# EAGLE board NN22_RPi_DetAdapter02_s00 (EAGLE 7.7.0), part 1 of 2
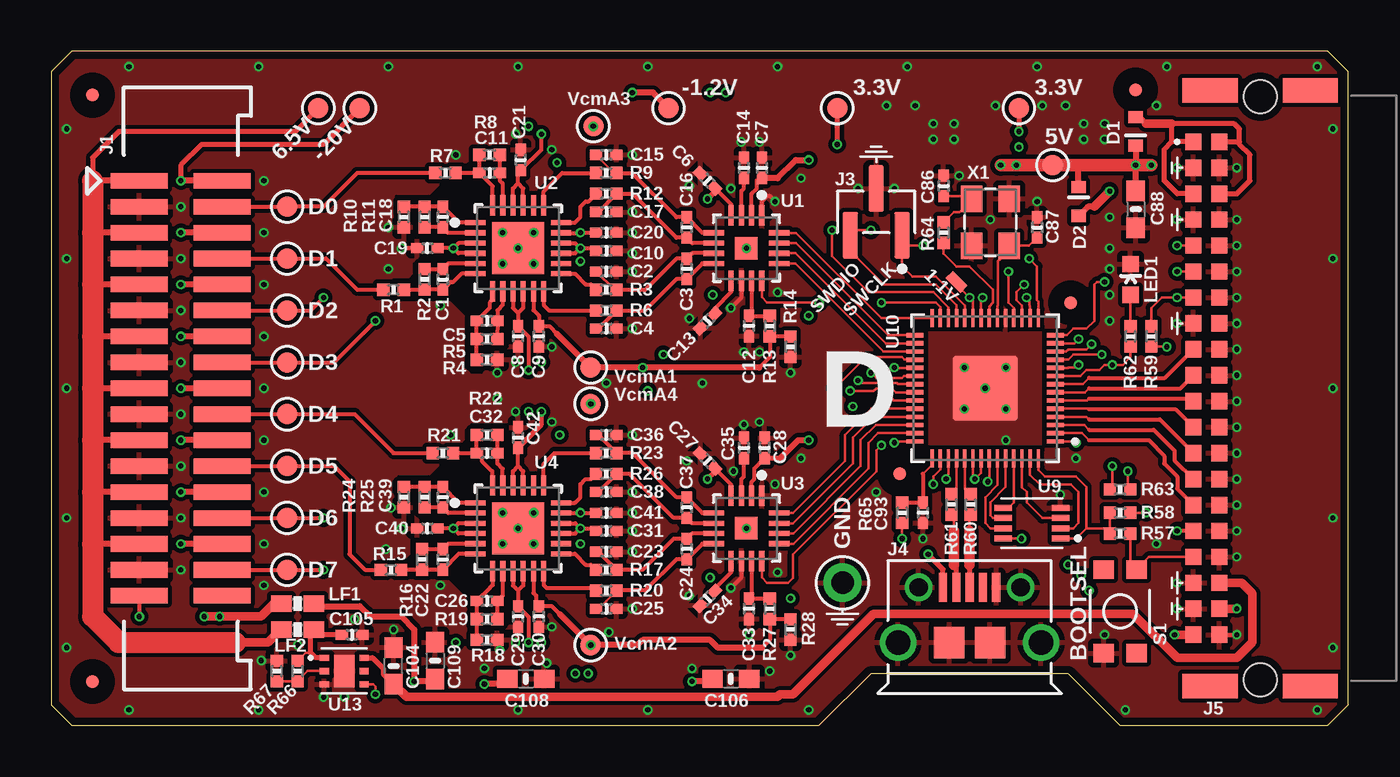
[diagram p0: board, top side]
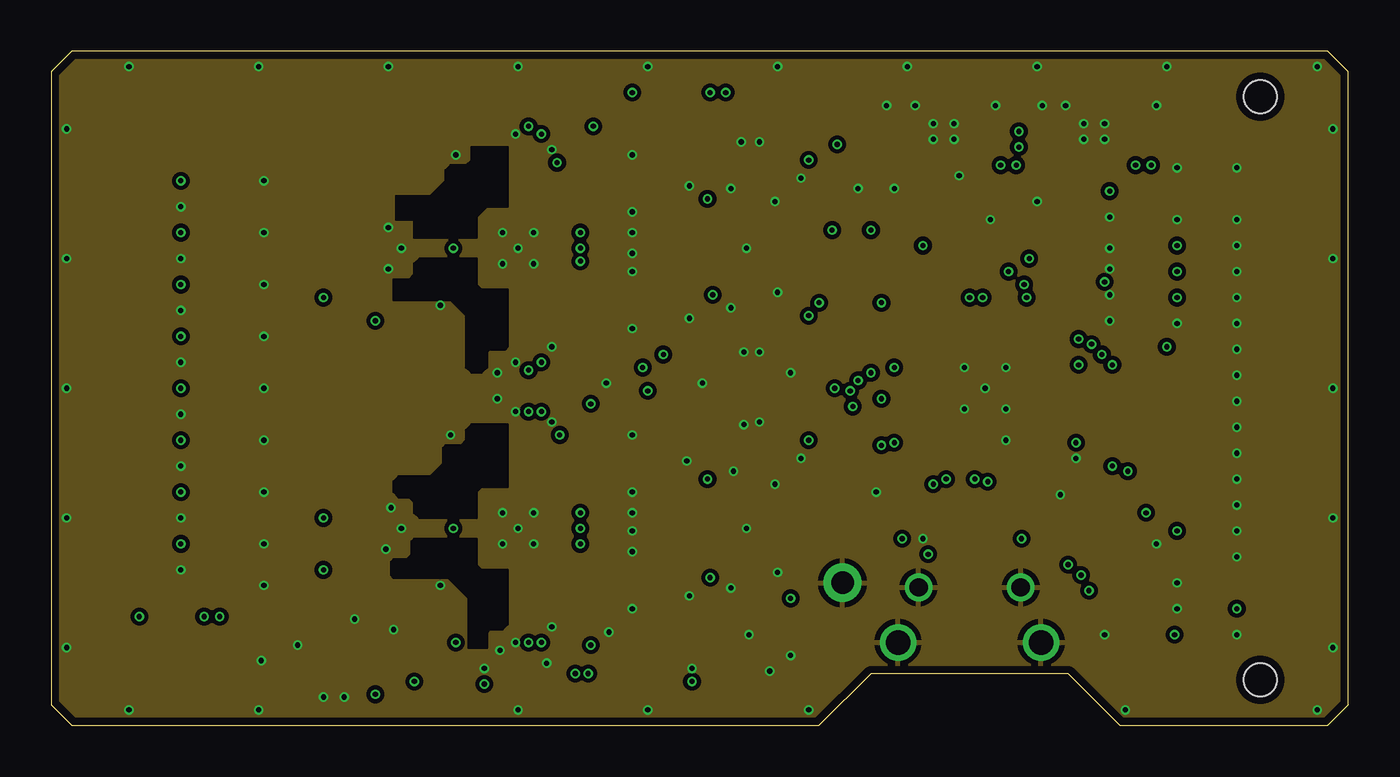
[diagram p1: board, inner layer Route2]
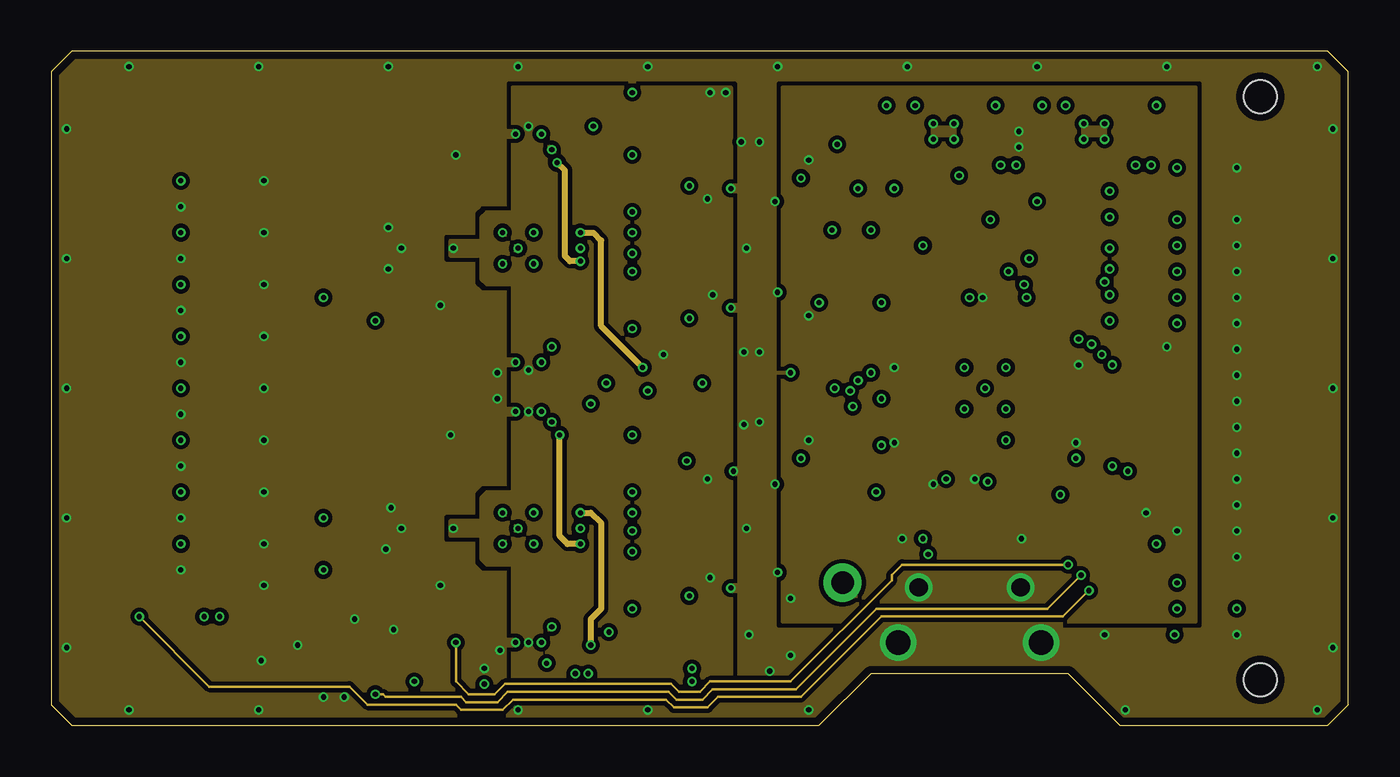
[diagram p2: board, inner layer Route3]
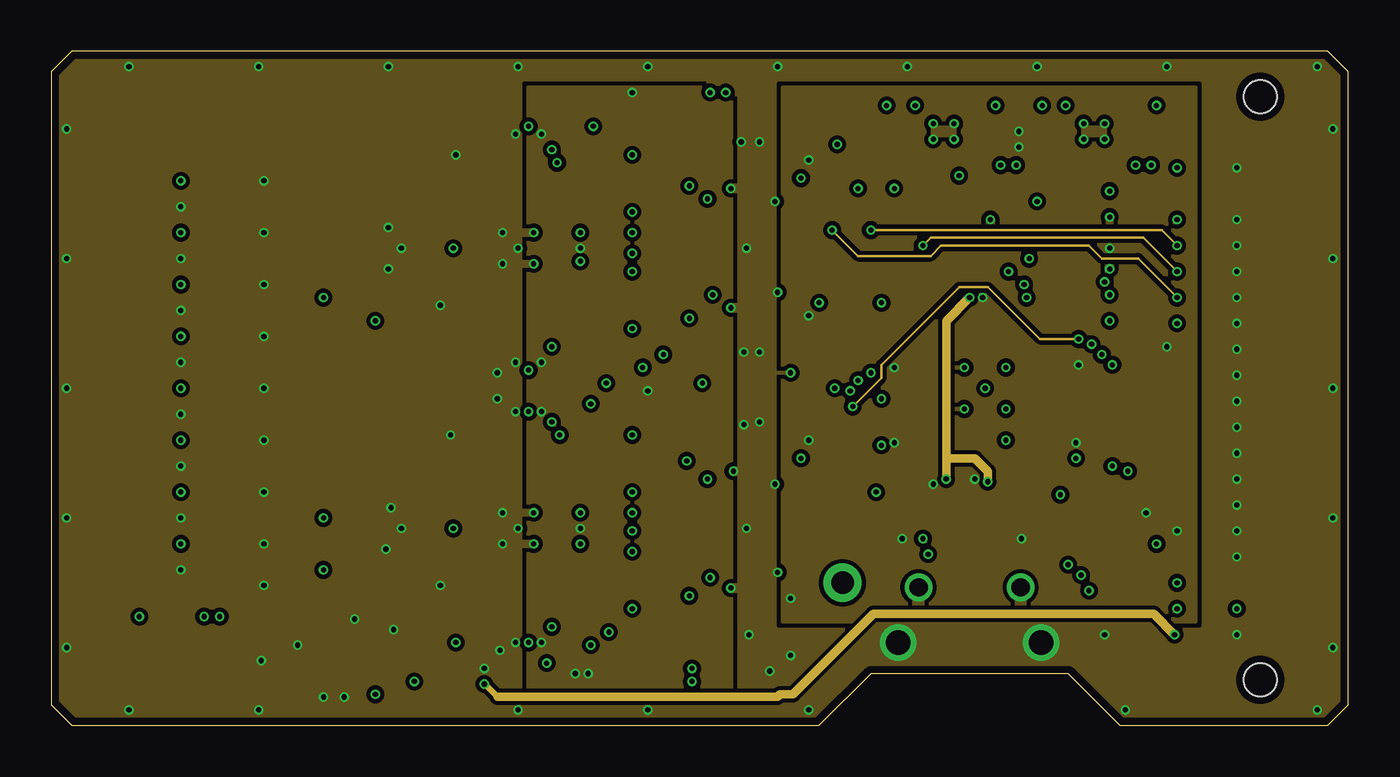
[diagram p3: board, inner layer Route14]
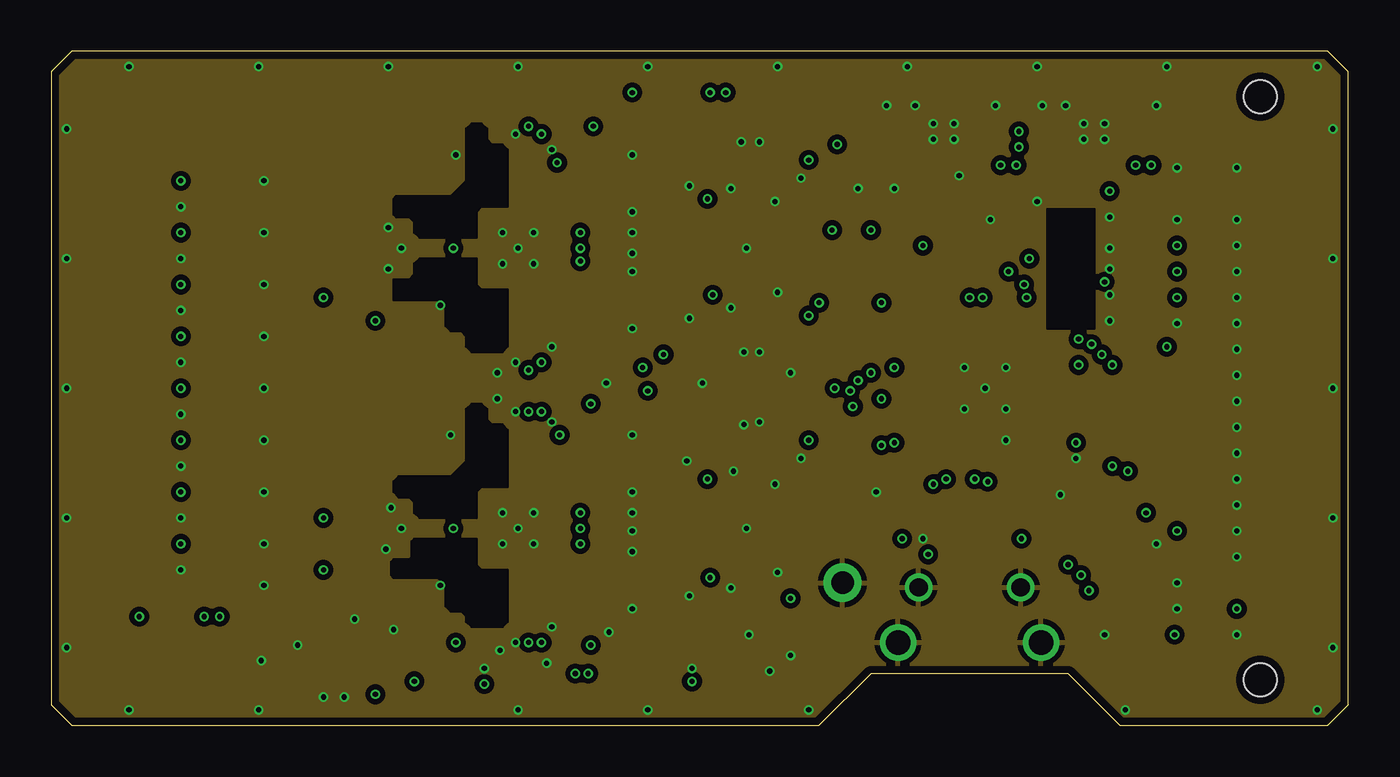
[diagram p4: board, inner layer Route15]
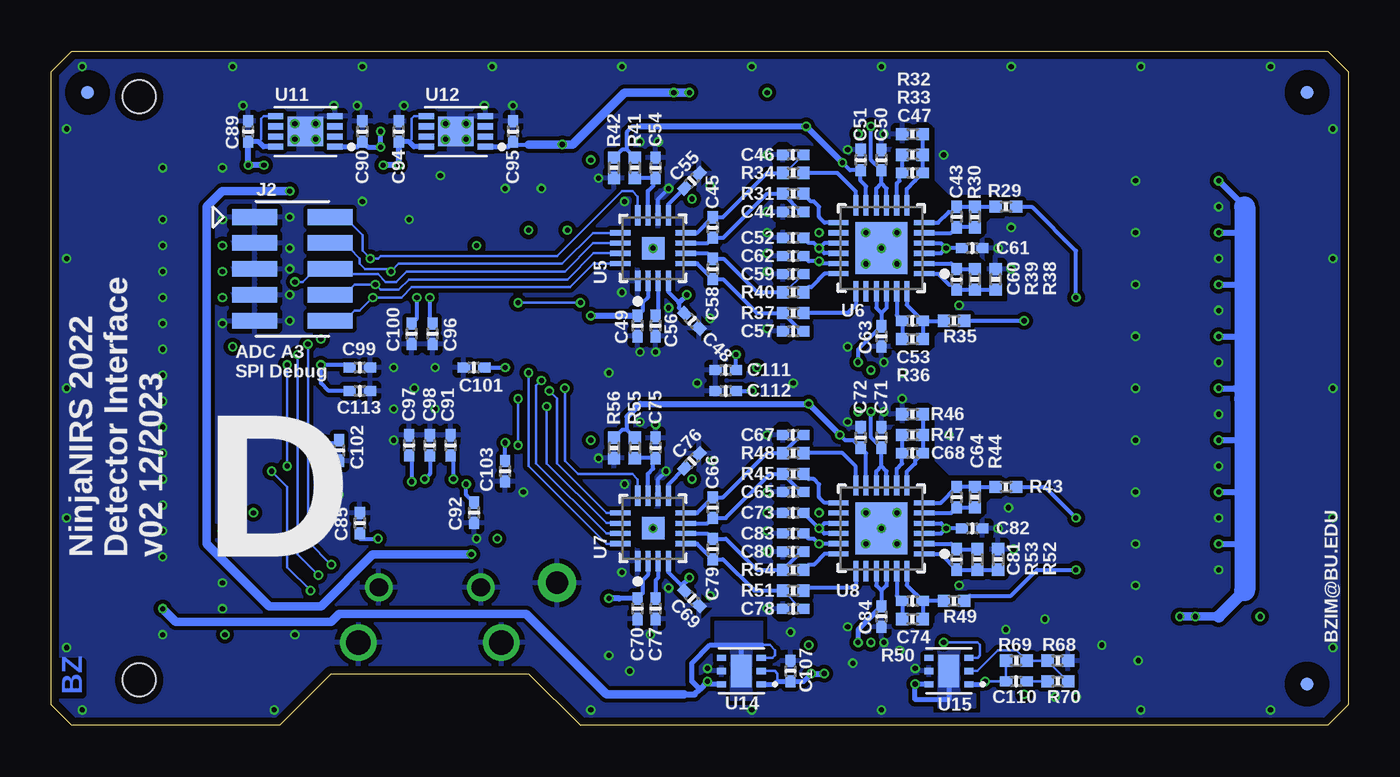
[diagram p5: board, bottom side, seen from below]

Size 63.5 x 33.02 mm. Coordinates in mm from the lower left corner, seen from the top.
Outline: 63.5,1.02 63.5,32 62.48,33.02 1.02,33.02 0,32 0,1.02 1.02,0 37.59,0 40.13,2.54 49.78,2.54 52.32,0 62.48,0 63.5,1.02
Copper layers (1*2*3*14*15*16): Top 0.04318125mm / dielectric 0.11074375mm / Route2 0.017271875mm / dielectric 4mil / Route3 0.017271875mm / dielectric 0.925575mm / Route14 0.017271875mm / dielectric 4mil / Route15 0.017271875mm / dielectric 0.11074375mm / Bottom 0.04318125mm
Design rules "oshpark-6layer *": minimum track width 5mil, minimum drill 10mil, track to track 5mil, track to pad 5mil, pad to pad 5mil, via to via 5mil, smd to smd 5mil, copper to edge 15mil, drill to drill 6mil, minimum pad ring 4mil, minimum via ring 4mil, stop-mask expansion 1.5mil, vias tented up to drill 12mil, thermal gap 10mil
tRestrict: area 35.1,24.9 to 35.1,25.1; area 23.4,19.2 to 23.5,19.4; area 24.2,19.2 to 24.3,19.4; area 27.6,23.7 to 27.8,23.8; area 27.6,24.7 to 27.8,24.7; area 27.6,25.4 to 27.8,25.5; area 21.3,21.8 to 24.4,24.9; area 33.3,22.6 to 34.8,24.1; area 21.3,8.1 to 24.4,11.2; area 33.3,8.9 to 34.8,10.4; area 57,24.1 to 57.3,24.2; area 57,22.8 to 57.3,22.9; 22 more areas
bRestrict: area 27.5,10.9 to 27.8,10.9; area 27.5,9.9 to 27.8,9.9; area 27.5,8.9 to 27.8,9; area 27.5,5.3 to 27.8,5.3; area 27.5,14.6 to 27.8,14.7; area 27.5,18.9 to 27.8,18.9; area 27.5,22.5 to 27.8,22.6; area 27.5,23.4 to 27.8,23.5; area 27.5,24.5 to 27.8,24.5; area 27.5,28.3 to 27.8,28.4; area 34.3,5.1 to 34.4,5.4; area 34.3,18.9 to 34.4,19.2; 4 more areas

## Footprints (pad centres in the part's own frame; a part is rotated, then mirrored left to right if it is on the bottom)
0402-CAP = smd 0.6 x 0.5: 1 -0.5,0; 2 0.5,0
0603-CAP = smd 1 x 0.9: 1 -0.9,0; 2 0.9,0
SOD523 = smd 0.6 x 0.7: A -0.7,0; C 0.7,0
MICRO-FIDUCIAL = smd 0.635 x 0.635: 1 0,0
M17X2_0.050_SHF = smd 2.794 x 0.762: 1 -2.032,10.16; 2 2.032,10.16; 3 -2.032,8.89; 4 2.032,8.89; 5 -2.032,7.62; 6 2.032,7.62; 7 -2.032,6.35; 8 2.032,6.35; 9 -2.032,5.08; 10 2.032,5.08; 11 -2.032,3.81; 12 2.032,3.81; 13 -2.032,2.54; 14 2.032,2.54; 15 -2.032,1.27; 16 2.032,1.27; 17 -2.032,0; 18 2.032,0; 19 -2.032,-1.27; 20 2.032,-1.27; 21 -2.032,-2.54; 22 2.032,-2.54; 23 -2.032,-3.81; 24 2.032,-3.81; 25 -2.032,-5.08; 26 2.032,-5.08; 27 -2.032,-6.35; 28 2.032,-6.35; 29 -2.032,-7.62; 30 2.032,-7.62; 31 -2.032,-8.89; 32 2.032,-8.89; 33 -2.032,-10.16; 34 2.032,-10.16
M05X2_0.050_SMD_NO_CREAM = smd 2.21 x 0.762: 1 -1.841,2.54; 2 1.841,2.54; 3 -1.841,1.27; 4 1.841,1.27; 5 -1.841,0; 6 1.841,0; 7 -1.841,-1.27; 8 1.841,-1.27; 9 -1.841,-2.54; 10 1.841,-2.54
M03X1_0.050_SMD_NO_CREAM = smd 0.762 x 2.286: 1 -1.27,1.143; 2 0,-1.143; 3 1.27,1.143
USB-MICRO = smd 0.4 x 1.4: 1 -1.3,2.7; 2 -0.65,2.7; 3 0,2.7; 4 0.65,2.7; 5 1.3,2.7 | drill 0.9: SH1 -2.5,2.7; SH2 2.5,2.7 | drill 1.2: SH3 -3.5,0; SH6 3.5,0 | smd 1.5 x 1.55: SH4 -1,0; SH5 1,0
M20X2_HARFLEX_M = smd 0.8 x 0.8: A1 12.065,2; A2 10.795,2; A3 9.525,2; A4 8.255,2; A5 6.985,2; A6 5.715,2; A7 4.445,2; A8 3.175,2; A9 1.905,2; A10 0.635,2; A11 -0.635,2; A12 -1.905,2; A13 -3.175,2; A14 -4.445,2; A15 -5.715,2; A16 -6.985,2; A17 -8.255,2; A18 -9.525,2; A19 -10.795,2; A20 -12.065,2; B1 12.065,3.27; B2 10.795,3.27; B3 9.525,3.27; B4 8.255,3.27; B5 6.985,3.27; B6 5.715,3.27; B7 4.445,3.27; B8 3.175,3.27; B9 1.905,3.27; B10 0.635,3.27; B11 -0.635,3.27; B12 -1.905,3.27; B13 -3.175,3.27; B14 -4.445,3.27; B15 -5.715,3.27; B16 -6.985,3.27; B17 -8.255,3.27; B18 -9.525,3.27; B19 -10.795,3.27; B20 -12.065,3.27 | smd 1.2 x 2.7: P$17 -14.575,2.45; P$18 -14.575,-2.45; P$19 14.575,2.45; P$20 14.575,-2.45 | hole 1.6: -14.275,0; 14.275,0
LED-0603 = smd 0.8 x 0.8: A 0,-0.75; C 0,0.75
0603-FER = smd 1 x 0.8: 1 -0.8,0; 2 0.8,0
0402-RES = smd 0.6 x 0.6: 1 -0.5,0; 2 0.5,0
TACTILE_SWITCH_SMD-3 = smd 0.9 x 1: 1 -2.05,0.8; 2 2.05,0.8; 3 -2.05,-0.8; 4 2.05,-0.8
TESTPAD_ROUND = smd 1.016 x 1.016: P$1 0,0
1X01 = drill 1.1 pad 1.88: 1 0,0
TESTPAD_SMALL = smd 1.016 x 0.508: P$1 0,0
LFCSP16 = smd 1 x 0.25: 1 -1.6,0.75; 2 -1.6,0.25; 3 -1.6,-0.25; 4 -1.6,-0.75; 9 1.6,-0.75; 10 1.6,-0.25; 11 1.6,0.25; 12 1.6,0.75 | smd 0.25 x 1: 5 -0.75,-1.6; 6 -0.25,-1.6; 7 0.25,-1.6; 8 0.75,-1.6; 13 0.75,1.6; 14 0.25,1.6; 15 -0.25,1.6; 16 -0.75,1.6 | smd 1.1 x 1.1: EP 0,0
LFCSP24 = smd 1 x 0.25: 1 -2.1,1.25; 2 -2.1,0.75; 3 -2.1,0.25; 4 -2.1,-0.25; 5 -2.1,-0.75; 6 -2.1,-1.25; 13 2.1,-1.25; 14 2.1,-0.75; 15 2.1,-0.25; 16 2.1,0.25; 17 2.1,0.75; 18 2.1,1.25 | smd 0.25 x 1: 7 -1.25,-2.1; 8 -0.75,-2.1; 9 -0.25,-2.1; 10 0.25,-2.1; 11 0.75,-2.1; 12 1.25,-2.1; 19 1.25,2.1; 20 0.75,2.1; 21 0.25,2.1; 22 -0.25,2.1; 23 -0.75,2.1; 24 -1.25,2.1 | smd 2.55 x 2.55: EP 0,0
USON8L-2X3MM = smd 0.85 x 0.3: 1 -1.4,0.75; 2 -1.4,0.25; 3 -1.4,-0.25; 4 -1.4,-0.75; 5 1.4,-0.75; 6 1.4,-0.25; 7 1.4,0.25; 8 1.4,0.75
QFN-56_EP = smd 0.875 x 0.2: 1 -3.438,2.6; 2 -3.438,2.2; 3 -3.438,1.8; 4 -3.438,1.4; 5 -3.438,1; 6 -3.438,0.6; 7 -3.438,0.2; 8 -3.438,-0.2; 9 -3.438,-0.6; 10 -3.438,-1; 11 -3.438,-1.4; 12 -3.438,-1.8; 13 -3.438,-2.2; 14 -3.438,-2.6; 29 3.438,-2.6; 30 3.438,-2.2; 31 3.438,-1.8; 32 3.438,-1.4; 33 3.438,-1; 34 3.438,-0.6; 35 3.438,-0.2; 36 3.438,0.2; 37 3.438,0.6; 38 3.438,1; 39 3.438,1.4; 40 3.438,1.8; 41 3.438,2.2; 42 3.438,2.6 | smd 0.2 x 0.875: 15 -2.6,-3.438; 16 -2.2,-3.438; 17 -1.8,-3.438; 18 -1.4,-3.438; 19 -1,-3.438; 20 -0.6,-3.438; 21 -0.2,-3.438; 22 0.2,-3.438; 23 0.6,-3.438; 24 1,-3.438; 25 1.4,-3.438; 26 1.8,-3.438; 27 2.2,-3.438; 28 2.6,-3.438; 43 2.6,3.438; 44 2.2,3.438; 45 1.8,3.438; 46 1.4,3.438; 47 1,3.438; 48 0.6,3.438; 49 0.2,3.438; 50 -0.2,3.438; 51 -0.6,3.438; 52 -1,3.438; 53 -1.4,3.438; 54 -1.8,3.438; 55 -2.2,3.438; 56 -2.6,3.438 | smd 3.2 x 3.2: PAD 0,0
DFN8_2X3MM = smd 0.75 x 0.3: 1 -1.45,0.75; 2 -1.45,0.25; 3 -1.45,-0.25; 4 -1.45,-0.75; 5 1.45,-0.75; 6 1.45,-0.25; 7 1.45,0.25; 8 1.45,0.75 | smd 1.75 x 1.45: P 0,0
WSON6 = smd 0.45 x 0.3: 1 -0.975,0.65; 2 -0.975,0; 3 -0.975,-0.65; 4 0.975,-0.65; 5 0.975,0; 6 0.975,0.65 | smd 1 x 1.6: PAD 0,0
CRYSTAL-3.2-2.5 = smd 1.3 x 1.05: 1 -1.15,-0.925; 2 1.15,-0.925; 3 1.15,0.925; 4 -1.15,0.925

## Placement (x,y rotation side)
C1  330p  [0402-CAP]  19.18,21.84 90 top
C2  1n  [0402-CAP]  27.18,22.23 180 top
C3  1n  [0402-CAP]  31.11,22.35 270 top
C4  1n  [0402-CAP]  27.18,19.43 0 top
C5  330p  [0402-CAP]  21.34,19.81 0 top
C6  1u  [0402-CAP]  32.13,26.67 135 top
C7  1u  [0402-CAP]  34.8,27.3 90 top
C8  0.1u  [0402-CAP]  22.86,19.05 270 top
C9  0.1u  [0402-CAP]  23.88,19.05 270 top
C10  0.1u  [0402-CAP]  27.18,23.24 0 top
C11  330p  [0402-CAP]  21.46,27.05 0 top
C12  1u  [0402-CAP]  34.16,19.56 270 top
C13  0.1u  [0402-CAP]  32.13,19.81 225 top
C14  1u  [0402-CAP]  33.91,27.3 90 top
C15  1n  [0402-CAP]  27.18,27.94 180 top
C16  1n  [0402-CAP]  31.11,24.38 270 top
C17  1n  [0402-CAP]  27.18,25.15 0 top
C18  330p  [0402-CAP]  19.18,24.89 270 top
C19  0.1u  [0402-CAP]  18.41,23.37 180 top
C20  0.1u  [0402-CAP]  27.18,24.13 0 top
C21  0.1u  [0402-CAP]  22.99,27.69 90 top
C22  330p  [0402-CAP]  19.18,8.13 90 top
C23  1n  [0402-CAP]  27.18,8.51 180 top
C24  1n  [0402-CAP]  31.11,8.64 270 top
C25  1n  [0402-CAP]  27.18,5.71 0 top
C26  330p  [0402-CAP]  21.34,6.1 0 top
C27  1u  [0402-CAP]  32.13,12.95 135 top
C28  1u  [0402-CAP]  34.92,13.59 90 top
C29  0.1u  [0402-CAP]  22.86,5.33 270 top
C30  0.1u  [0402-CAP]  23.88,5.33 270 top
C31  0.1u  [0402-CAP]  27.18,9.53 0 top
C32  330p  [0402-CAP]  21.34,13.34 0 top
C33  1u  [0402-CAP]  34.16,5.71 270 top
C34  0.1u  [0402-CAP]  32.13,6.22 225 top
C35  1u  [0402-CAP]  33.91,13.59 90 top
C36  1n  [0402-CAP]  27.18,14.22 180 top
C37  1n  [0402-CAP]  31.11,10.67 270 top
C38  1n  [0402-CAP]  27.18,11.43 0 top
C39  330p  [0402-CAP]  19.18,11.18 270 top
C40  0.1u  [0402-CAP]  18.41,9.65 180 top
C41  0.1u  [0402-CAP]  27.18,10.41 0 top
C42  0.1u  [0402-CAP]  22.86,14.1 90 top
C43  330p  [0402-CAP]  19.18,24.89 270 bottom
C44  1n  [0402-CAP]  27.18,25.15 0 bottom
C45  1n  [0402-CAP]  31.11,24.38 90 bottom
C46  1n  [0402-CAP]  27.18,27.94 180 bottom
C47  330p  [0402-CAP]  21.34,27.05 180 bottom
C48  1u  [0402-CAP]  32.13,19.81 315 bottom
C49  1u  [0402-CAP]  34.8,19.56 270 bottom
C50  0.1u  [0402-CAP]  22.86,27.69 90 bottom
C51  0.1u  [0402-CAP]  23.88,27.69 90 bottom
C52  0.1u  [0402-CAP]  27.18,23.88 180 bottom
C53  330p  [0402-CAP]  21.34,19.81 180 bottom
C54  1u  [0402-CAP]  33.91,27.3 90 bottom
C55  0.1u  [0402-CAP]  32.13,26.67 45 bottom
C56  1u  [0402-CAP]  33.91,19.56 270 bottom
C57  1n  [0402-CAP]  27.18,19.3 0 bottom
C58  1n  [0402-CAP]  31.11,22.35 90 bottom
C59  1n  [0402-CAP]  27.18,22.1 180 bottom
C60  330p  [0402-CAP]  19.18,21.84 90 bottom
C61  0.1u  [0402-CAP]  18.41,23.37 0 bottom
C62  0.1u  [0402-CAP]  27.18,22.99 180 bottom
C63  0.1u  [0402-CAP]  22.86,19.05 270 bottom
C64  330p  [0402-CAP]  19.18,11.18 270 bottom
C65  1n  [0402-CAP]  27.18,11.43 0 bottom
C66  1n  [0402-CAP]  31.11,10.67 90 bottom
C67  1n  [0402-CAP]  27.18,14.22 180 bottom
C68  330p  [0402-CAP]  21.34,13.34 180 bottom
C69  1u  [0402-CAP]  32.13,6.22 315 bottom
C70  1u  [0402-CAP]  34.8,5.71 270 bottom
C71  0.1u  [0402-CAP]  22.86,14.1 90 bottom
C72  0.1u  [0402-CAP]  23.88,14.1 90 bottom
C73  0.1u  [0402-CAP]  27.18,10.41 180 bottom
C74  330p  [0402-CAP]  21.34,6.1 180 bottom
C75  1u  [0402-CAP]  33.91,13.59 90 bottom
C76  0.1u  [0402-CAP]  32.13,12.95 45 bottom
C77  1u  [0402-CAP]  33.91,5.71 270 bottom
C78  1n  [0402-CAP]  27.18,5.71 0 bottom
C79  1n  [0402-CAP]  31.11,8.64 90 bottom
C80  1n  [0402-CAP]  27.18,8.51 180 bottom
C81  330p  [0402-CAP]  19.18,8.13 90 bottom
C82  0.1u  [0402-CAP]  18.41,9.65 0 bottom
C83  0.1u  [0402-CAP]  27.18,9.4 180 bottom
C84  0.1u  [0402-CAP]  22.86,5.33 270 bottom
C85  0.1u  [0402-CAP]  48.39,9.91 90 bottom
C86  27p  [0402-CAP]  43.69,26.42 90 top
C87  27p  [0402-CAP]  48.26,24.38 90 top
C88  10u  [0603-CAP]  53.09,25.27 270 top
C89  4.7u  [0402-CAP]  53.85,29.08 90 bottom
C90  4.7u  [0402-CAP]  48.26,29.08 90 bottom
C91  4.7u  [0402-CAP]  43.94,13.72 90 bottom
C92  4.7u  [0402-CAP]  42.8,10.41 270 bottom
C93  4.7u  [0402-CAP]  42.67,10.41 270 top
C94  4.7u  [0402-CAP]  46.48,29.08 90 bottom
C95  4.7u  [0402-CAP]  40.89,29.08 90 bottom
C96  0.1u  [0402-CAP]  44.83,19.18 270 bottom
C97  0.1u  [0402-CAP]  45.97,13.72 90 bottom
C98  0.1u  [0402-CAP]  44.96,13.72 90 bottom
C99  0.1u  [0402-CAP]  48.39,17.53 0 bottom
C100  0.1u  [0402-CAP]  45.85,19.18 270 bottom
C101  0.1u  [0402-CAP]  42.8,17.53 180 bottom
C102  0.1u  [0402-CAP]  49.4,13.46 270 bottom
C103  0.1u  [0402-CAP]  41.27,12.45 270 bottom
C104  10u  [0603-CAP]  16.76,2.92 90 top
C105  4.7u  [0402-CAP]  14.73,4.45 0 top
C106  10u  [0603-CAP]  33.27,2.29 180 top
C107  4.7u  [0402-CAP]  27.3,2.67 270 bottom
C108  10u  [0603-CAP]  23.24,2.29 180 top
C109  10u  [0603-CAP]  18.8,3.17 270 top
C110  33n  [0402-CAP]  16.26,2.16 180 bottom
C111  4.7u  [0402-CAP]  30.48,17.4 180 bottom
C112  4.7u  [0402-CAP]  30.48,16.38 0 bottom
C113  4.7u  [0402-CAP]  48.39,16.38 0 bottom
D1  SBR1A20T5  [SOD523]  53.09,29.08 270 top
D2  SBR1A20T5  [SOD523]  50.29,25.65 90 top
FID1  FIDUCIALUFIDUCIAL  [MICRO-FIDUCIAL]  2.03,30.86 0 top
FID2  FIDUCIALUFIDUCIAL  [MICRO-FIDUCIAL]  2.03,2.16 0 top
FID3  FIDUCIALUFIDUCIAL  [MICRO-FIDUCIAL]  53.09,31.11 0 top
FID4  FIDUCIALUFIDUCIAL  [MICRO-FIDUCIAL]  2.03,30.99 0 bottom
FID5  FIDUCIALUFIDUCIAL  [MICRO-FIDUCIAL]  2.03,2.03 0 bottom
FID6  FIDUCIALUFIDUCIAL  [MICRO-FIDUCIAL]  61.72,30.99 0 bottom
FID7  FIDUCIALUFIDUCIAL  [MICRO-FIDUCIAL]  49.91,20.7 0 top
FID8  FIDUCIALUFIDUCIAL  [MICRO-FIDUCIAL]  41.53,12.32 0 top
J1  M17X2  [M17X2_0.050_SHF]  6.35,16.51 0 top
J2  M05X2_SMD_0.050_NOCREAM  [M05X2_0.050_SMD_NO_CREAM]  51.69,22.35 0 bottom
J3  M03X1_0.050_SMD_NO_CREAM  [M03X1_0.050_SMD_NO_CREAM]  40.39,25.15 180 top
J4  USB-MICRO  [USB-MICRO]  44.96,4.06 0 top
J5  M20X2_HARFLEX_M  [M20X2_HARFLEX_M]  59.18,16.51 90 top
LED1  [LED-0603]  52.83,21.84 0 top
LF1  FERRITE0603  [0603-FER]  12.06,4.7 0 top
LF2  FERRITE0603  [0603-FER]  12.06,5.97 0 top
R1  18k  [0402-RES]  16.76,21.34 0 top
R2  2.2k  [0402-RES]  18.29,21.84 90 top
R3  33  [0402-RES]  27.18,21.34 0 top
R4  18k  [0402-RES]  21.34,17.91 180 top
R5  2.2k  [0402-RES]  21.34,18.92 0 top
R6  33  [0402-RES]  27.18,20.32 0 top
R7  18k  [0402-RES]  19.3,27.05 0 top
R8  2.2k  [0402-RES]  21.46,27.94 0 top
R9  33  [0402-RES]  27.18,27.05 0 top
R10  18k  [0402-RES]  17.27,24.89 90 top
R11  2.2k  [0402-RES]  18.29,24.89 270 top
R12  33  [0402-RES]  27.18,26.04 0 top
R13  18k  [0402-RES]  35.18,19.56 90 top
R14  18k  [0402-RES]  36.2,18.54 90 top
R15  18k  [0402-RES]  16.64,7.62 0 top
R16  2.2k  [0402-RES]  18.16,8.13 90 top
R17  33  [0402-RES]  27.18,7.62 0 top
R18  18k  [0402-RES]  21.34,4.19 180 top
R19  2.2k  [0402-RES]  21.34,5.21 0 top
R20  33  [0402-RES]  27.18,6.6 0 top
R21  18k  [0402-RES]  19.18,13.34 0 top
R22  2.2k  [0402-RES]  21.34,14.22 0 top
R23  33  [0402-RES]  27.18,13.34 0 top
R24  18k  [0402-RES]  17.27,11.18 90 top
R25  2.2k  [0402-RES]  18.29,11.18 270 top
R26  33  [0402-RES]  27.18,12.32 0 top
R27  18k  [0402-RES]  35.18,5.71 90 top
R28  18k  [0402-RES]  36.2,4.7 90 top
R29  18k  [0402-RES]  16.76,25.4 180 bottom
R30  2.2k  [0402-RES]  18.29,24.89 270 bottom
R31  33  [0402-RES]  27.18,26.04 180 bottom
R32  18k  [0402-RES]  21.34,28.96 0 bottom
R33  2.2k  [0402-RES]  21.34,27.94 180 bottom
R34  33  [0402-RES]  27.18,27.05 180 bottom
R35  18k  [0402-RES]  19.3,19.81 180 bottom
R36  2.2k  [0402-RES]  21.34,18.92 180 bottom
R37  33  [0402-RES]  27.18,20.19 180 bottom
R38  18k  [0402-RES]  17.27,21.84 270 bottom
R39  2.2k  [0402-RES]  18.29,21.84 90 bottom
R40  33  [0402-RES]  27.18,21.21 180 bottom
R41  18k  [0402-RES]  34.92,27.3 270 bottom
R42  18k  [0402-RES]  35.94,27.3 90 bottom
R43  18k  [0402-RES]  16.76,11.68 180 bottom
R44  2.2k  [0402-RES]  18.29,11.18 270 bottom
R45  33  [0402-RES]  27.18,12.32 180 bottom
R46  18k  [0402-RES]  21.34,15.24 0 bottom
R47  2.2k  [0402-RES]  21.34,14.22 180 bottom
R48  33  [0402-RES]  27.18,13.34 180 bottom
R49  18k  [0402-RES]  19.3,6.1 180 bottom
R50  2.2k  [0402-RES]  21.34,5.21 180 bottom
R51  33  [0402-RES]  27.18,6.6 180 bottom
R52  18k  [0402-RES]  17.14,8.13 270 bottom
R53  2.2k  [0402-RES]  18.16,8.13 90 bottom
R54  33  [0402-RES]  27.18,7.62 180 bottom
R55  18k  [0402-RES]  34.92,13.59 270 bottom
R56  18k  [0402-RES]  35.94,13.59 90 bottom
R57  1.2k  [0402-RES]  52.32,9.4 180 top
R58  100k  [0402-RES]  52.32,10.41 0 top
R59  100k  [0402-RES]  53.85,19.05 270 top
R60  27  [0402-RES]  45.01,10.82 270 top
R61  27  [0402-RES]  44.07,10.82 270 top
R62  1.2k  [0402-RES]  52.83,19.05 270 top
R63  DNP  [0402-RES]  52.32,11.56 0 top
R64  1.2k  [0402-RES]  43.69,24.13 90 top
R65  33  [0402-RES]  41.66,10.41 90 top
R66  30k  [0402-RES]  12.06,2.67 90 top
R67  100k  [0402-RES]  11.05,2.67 270 top
R68  10k  [0402-RES]  14.22,3.17 0 bottom
R69  154k  [0402-RES]  16.26,3.17 0 bottom
R70  10k  [0402-RES]  14.22,2.16 0 bottom
S1  SWITCH-MOMENTARY-2SMD-3  [TACTILE_SWITCH_SMD-3]  52.32,5.59 90 top
TP1  TESTPOINT_ROUND  [TESTPAD_ROUND]  11.56,22.86 0 top
TP2  TESTPOINT_ROUND  [TESTPAD_ROUND]  13.08,30.23 0 top
TP3  TESTPOINT_ROUND  [TESTPAD_ROUND]  15.11,30.23 0 top
TP4  TESTPOINT_ROUND  [TESTPAD_ROUND]  11.56,25.4 0 top
TP5  TESTPOINT_ROUND  [TESTPAD_ROUND]  26.42,17.53 0 top
TP6  TESTPOINT_ROUND  [TESTPAD_ROUND]  11.56,12.7 0 top
TP7  TESTPOINT_ROUND  [TESTPAD_ROUND]  11.56,15.24 0 top
TP8  TESTPOINT_ROUND  [TESTPAD_ROUND]  26.42,3.94 0 top
TP9  TESTPOINT_ROUND  [TESTPAD_ROUND]  11.56,20.32 0 top
TP11  TESTPOINT_ROUND  [TESTPAD_ROUND]  11.56,17.78 0 top
TP12  TESTPOINT_ROUND  [TESTPAD_ROUND]  26.54,29.34 0 top
TP13  TESTPOINT_ROUND  [TESTPAD_ROUND]  11.56,10.16 0 top
TP15  TESTPOINT_ROUND  [TESTPAD_ROUND]  11.56,7.62 0 top
TP16  TESTPOINT_ROUND  [TESTPAD_ROUND]  26.42,15.75 0 top
TP17  TESTPOINT_ROUND  [TESTPAD_ROUND]  47.37,30.23 0 top
TP18  TESTPOINT_ROUND  [TESTPAD_ROUND]  38.48,30.23 0 top
TP19  TESTPOINT_ROUND  [TESTPAD_ROUND]  30.23,30.23 0 top
TP20  TESTPOINT1X01  [1X01]  38.73,6.99 0 top
TP21  TESTPOINTPADSMALL  [TESTPAD_SMALL]  44.32,21.72 135 top
TP22  TESTPOINT_ROUND  [TESTPAD_ROUND]  49.02,27.43 0 top
U1  AD7380  [LFCSP16]  34.04,23.37 270 top
U2  ADA4940-2  [LFCSP24]  22.86,23.37 0 top
U3  AD7380  [LFCSP16]  34.04,9.65 270 top
U4  ADA4940-2  [LFCSP24]  22.86,9.65 0 top
U5  AD7380  [LFCSP16]  34.04,23.37 90 bottom
U6  ADA4940-2  [LFCSP24]  22.86,23.37 180 bottom
U7  AD7380  [LFCSP16]  34.04,9.65 90 bottom
U8  ADA4940-2  [LFCSP24]  22.86,9.65 180 bottom
U9  W25Q_USON  [USON8L-2X3MM]  48.01,9.91 180 top
U10  RP2040  [QFN-56_EP]  45.72,16.51 180 top
U11  MCP1755_DFN  [DFN8_2X3MM]  51.05,29.08 180 bottom
U12  MCP1755_DFN  [DFN8_2X3MM]  43.69,29.08 180 bottom
U13  ADP7142_WSON  [WSON6]  14.35,2.67 0 top
U14  ADP7182_WSON  [WSON6]  29.72,2.67 180 bottom
U15  ADP7182_WSON  [WSON6]  19.56,2.67 180 bottom
X1  CRYSTAL-3.2-2.5  [CRYSTAL-3.2-2.5]  45.97,24.64 270 top

## Library data of the parts
C1-C113 D1 D2 FID1-FID8 J1-J5 LED1 LF1 LF2 R1-R70 S1 TP1-TP9 TP11-TP13 TP15-TP22 U1-U15 X1 = MyLib

## Nets
/CS_A1: U1.12 U10.27
/CS_A2: U3.12 U10.37
/CS_A3: J2.2 U5.12 U10.15
/CS_A4: U7.12 U10.32
A_COMM: J1.33 R63.2
BOOTSEL: J5.B17 R57.1 S1.4
DET0: J1.4 R7.1 TP4.P$1
DET1: J1.8 R1.1 TP1.P$1
DET2: J1.12 R29.1 TP9.P$1
DET3: J1.16 R35.1 TP11.P$1
DET4: J1.20 R21.1 TP7.P$1
DET5: J1.24 R15.1 TP6.P$1
DET6: J1.28 R43.1 TP13.P$1
DET7: J1.32 R49.1 TP15.P$1
GND: C2.1 C4.2 C6.2 C7.2 C8.2 C9.2 C10.2 C12.2 C13.2 C14.2 C15.1 C17.2 C19.2 C20.2 C21.2 C23.1 C25.2 C27.2 C28.2 C29.2 C30.2 C31.2 C33.2 C34.2 C35.2 C36.1 C38.2 C40.2 C41.2 C42.2 C44.1 C46.2 C48.2 C49.2 C50.2 C51.2 C52.2 C54.2 C55.2 C56.2 C57.1 C59.2 C61.2 C62.2 C63.2 C65.1 C67.2 C69.2 C70.2 C71.2 C72.2 C73.2 C75.2 C76.2 C77.2 C78.1 C80.2 C82.2 C83.2 C84.2 C85.2 C86.2 C87.2 C88.2 C89.2 C90.2 C91.2 C92.2 C93.2 C94.2 C95.2 C96.2 C97.2 C98.2 C99.2 C100.2 C101.2 C102.2 C103.2 C104.2 C105.2 C106.1 C107.1 C108.1 C109.1 C111.2 C112.1 C113.2 J1.3 J1.7 J1.11 J1.15 J1.19 J1.23 J1.27 J1.31 J2.1 J2.3 J2.5 J2.7 J2.9 J3.2 J4.5 J4.SH1 J4.SH2 J4.SH3 J4.SH4 J4.SH5 J4.SH6 J5.A2 J5.A4 J5.A5 J5.A6 J5.A7 J5.A8 J5.A9 J5.A10 J5.A11 J5.A12 J5.A13 J5.A14 J5.A15 J5.A16 J5.A17 J5.A20 J5.B2 J5.B4 J5.B8 J5.B18 J5.B19 LED1.C R4.1 R10.1 R14.1 R18.1 R24.1 R28.1 R32.1 R38.1 R42.1 R46.1 R52.1 R56.1 R67.1 R68.2 S1.1 TP20.1 U1.1 U1.10 U1.EP U2.EP U3.1 U3.10 U3.EP U4.EP U5.1 U5.10 U5.EP U6.EP U7.1 U7.10 U7.EP U8.EP U9.4 U10.19 U10.PAD U11.4 U11.P U12.4 U12.P U13.3 U13.PAD U14.5 U15.5 X1.2 X1.4
GPIO00: J5.B15 U10.2
GPIO01: J5.B14 U10.3
GPIO02: J5.B13 U10.4
GPIO03: J5.B12 U10.5
GPIO04: J5.B11 U10.6
GPIO05: J5.B10 U10.7
GPIO06: J5.B9 U10.8
LED: R62.2 R63.1 U10.9
N$1: R3.1 U2.13
N$2: R6.1 U2.12
N$3: C2.2 C3.1 R3.2 U1.7
N$4: C3.2 C4.1 R6.2 U1.8
N$5: C11.2 R8.2 U2.23
N$6: C12.1 R13.2 U1.11
N$7: C13.1 U1.9
N$8: C14.1 U1.3
N$9: C18.2 R11.2 U2.2
N$10: R17.1 U4.13
N$11: R9.1 U2.19
N$12: R12.1 U2.18
N$13: C15.2 C16.1 R9.2 U1.5
N$14: C16.2 C17.1 R12.2 U1.6
N$15: R20.1 U4.12
N$16: C87.1 U10.20 X1.3
N$17: C86.1 R64.2 X1.1
N$18: R64.1 U10.21
N$19: C1.1 R1.2 R2.1 U2.6
N$20: C1.2 R2.2 U2.5
N$21: C5.2 R5.2 U2.8
N$22: C5.1 R4.2 R5.1 U2.7
N$23: C11.1 R7.2 R8.1 U2.24
N$24: C18.1 R10.2 R11.1 U2.1
N$25: C23.2 C24.1 R17.2 U3.7
N$26: C24.2 C25.1 R20.2 U3.8
N$27: R68.1 R69.2 R70.2 U15.2
N$28: R66.1 R67.2 U13.2
N$29: R60.1 U10.47
N$30: R61.1 U10.46
N$32: C33.1 R27.2 U3.11
N$33: C34.1 U3.9
N$34: C35.1 U3.3
N$35: J4.2 R61.2
N$37: J4.3 R60.2
N$39: R23.1 U4.19
N$40: R26.1 U4.18
N$41: C36.2 C37.1 R23.2 U3.5
N$42: C37.2 C38.1 R26.2 U3.6
N$43: C93.1 R65.2 U10.43
N$45: C22.1 R15.2 R16.1 U4.6
N$46: C22.2 R16.2 U4.5
N$47: C26.2 R19.2 U4.8
N$48: C26.1 R18.2 R19.1 U4.7
N$49: C32.1 R21.2 R22.1 U4.24
N$50: C39.1 R24.2 R25.1 U4.1
N$51: C32.2 R22.2 U4.23
N$52: C39.2 R25.2 U4.2
N$55: R31.1 U6.13
N$56: R34.1 U6.12
N$57: C44.2 C45.1 R31.2 U5.7
N$58: C45.2 C46.1 R34.2 U5.8
N$59: C54.1 R41.2 U5.11
N$60: C55.1 U5.9
N$61: C56.1 U5.3
N$62: R37.1 U6.19
N$63: R40.1 U6.18
N$64: C57.2 C58.1 R37.2 U5.5
N$65: C58.2 C59.1 R40.2 U5.6
N$68: C43.1 R29.2 R30.1 U6.6
N$69: C43.2 R30.2 U6.5
N$70: C47.2 R33.2 U6.8
N$71: C47.1 R32.2 R33.1 U6.7
N$72: C53.1 R35.2 R36.1 U6.24
N$73: C60.1 R38.2 R39.1 U6.1
N$74: C53.2 R36.2 U6.23
N$75: C60.2 R39.2 U6.2
N$78: R45.1 U8.13
N$79: R48.1 U8.12
N$80: C65.2 C66.1 R45.2 U7.7
N$81: C66.2 C67.1 R48.2 U7.8
N$82: C75.1 R55.2 U7.11
N$83: C76.1 U7.9
N$84: C77.1 U7.3
N$85: R51.1 U8.19
N$86: R54.1 U8.18
N$87: C78.2 C79.1 R51.2 U7.5
N$88: C79.2 C80.1 R54.2 U7.6
N$91: C64.1 R43.2 R44.1 U8.6
N$92: C64.2 R44.2 U8.5
N$93: C68.2 R47.2 U8.8
N$94: C68.1 R46.2 R47.1 U8.7
N$95: C74.1 R49.2 R50.1 U8.24
N$96: C81.1 R52.2 R53.1 U8.1
N$97: C74.2 R50.2 U8.23
N$98: C81.2 R53.2 U8.2
N$108: C110.1 R70.1
N$109: LED1.A R62.1
OPT_EN_VN: U10.12 U15.3
OPT_EN_VP: U10.11 U13.4
QSPI_SCLK: U9.6 U10.52
QSPI_SD0: U9.5 U10.53
QSPI_SD1: U9.2 U10.55
QSPI_SD2: U9.3 U10.54
QSPI_SD3: U9.7 U10.51
QSPI_SS_N: R57.2 R58.1 U9.1 U10.56
RUN: J5.B7 R59.1 U10.26
SCLK_A1: U1.16 U10.28
SCLK_A2: U3.16 U10.38
SCLK_A3: J2.10 U5.16 U10.16
SCLK_A4: U7.16 U10.34
SDI_A1: U1.15 U10.29
SDI_A2: U3.15 U10.39
SDI_A3: J2.8 U5.15 U10.17
SDI_A4: U7.15 U10.35
SDOA_A1: U1.13 U10.31
SDOA_A2: U3.13 U10.41
SDOA_A3: J2.4 U5.13 U10.18
SDOA_A4: U7.13 U10.36
SDOB_A1: U1.14 U10.30
SDOB_A2: U3.14 U10.40
SDOB_A3: J2.6 U5.14 U10.14
SDOB_A4: U7.14 U10.13
SWCLK: J3.1 J5.B6 U10.24
SWDIO: J3.3 J5.B5 U10.25
V1P1: C91.1 C96.1 C97.1 TP21.P$1 U10.23 U10.45 U10.50
V3P3: C7.1 C28.1 C49.1 C70.1 C85.1 C90.1 C92.1 C98.1 C99.1 C100.1 C101.1 C102.1 C103.1 C113.1 J5.B16 R58.2 R59.2 R65.1 TP17.P$1 U1.2 U3.2 U5.2 U7.2 U9.8 U10.1 U10.10 U10.22 U10.33 U10.42 U10.44 U10.48 U10.49 U11.1
V3P3A: C6.1 C8.1 C19.1 C27.1 C29.1 C40.1 C48.1 C50.1 C61.1 C69.1 C71.1 C82.1 C95.1 C111.1 TP18.P$1 U1.4 U2.3 U2.4 U2.9 U2.10 U3.4 U4.3 U4.4 U4.9 U4.10 U5.4 U6.3 U6.4 U6.9 U6.10 U7.4 U8.3 U8.4 U8.9 U8.10 U12.1
V5P0: C88.1 C89.1 C94.1 D1.C D2.C TP22.P$1 U11.5 U11.8 U12.5 U12.8
V5P0_IN: D1.A J5.A1 J5.A3 J5.B1 J5.B3
V6P5: C105.1 LF1.2 R66.2 U13.1
V6P5CON: J1.1 J1.5 J1.9 J1.13 J1.17 J1.21 J1.25 J1.29 LF1.1 TP2.P$1
V9P0: C104.1 J5.A18 U13.6
VBUS: D2.A J4.1
VN1P2: C10.1 C21.1 C31.1 C42.1 C52.1 C63.1 C73.1 C84.1 C107.2 C112.2 TP19.P$1 U2.15 U2.16 U2.21 U2.22 U4.15 U4.16 U4.21 U4.22 U6.15 U6.16 U6.21 U6.22 U8.15 U8.16 U8.21 U8.22 U14.1 U14.2
VN3P0: C106.2 J5.A19 U14.3 U14.6 U14.PAD
VN20P0: C109.2 C110.2 LF2.2 R69.1 U15.1
VN20P0CON: J1.2 J1.6 J1.10 J1.14 J1.18 J1.22 J1.26 J1.30 LF2.1 TP3.P$1
VN22: C108.2 J5.B20 U15.6 U15.PAD
VOCM_A1: C9.1 C20.1 R13.1 R14.2 TP5.P$1 U2.11 U2.17
VOCM_A2: C30.1 C41.1 R27.1 R28.2 TP8.P$1 U4.11 U4.17
VOCM_A3: C51.1 C62.1 R41.1 R42.2 TP12.P$1 U6.11 U6.17
VOCM_A4: C72.1 C83.1 R55.1 R56.2 TP16.P$1 U8.11 U8.17